# Allegro board PULSE_MODULATION.brd
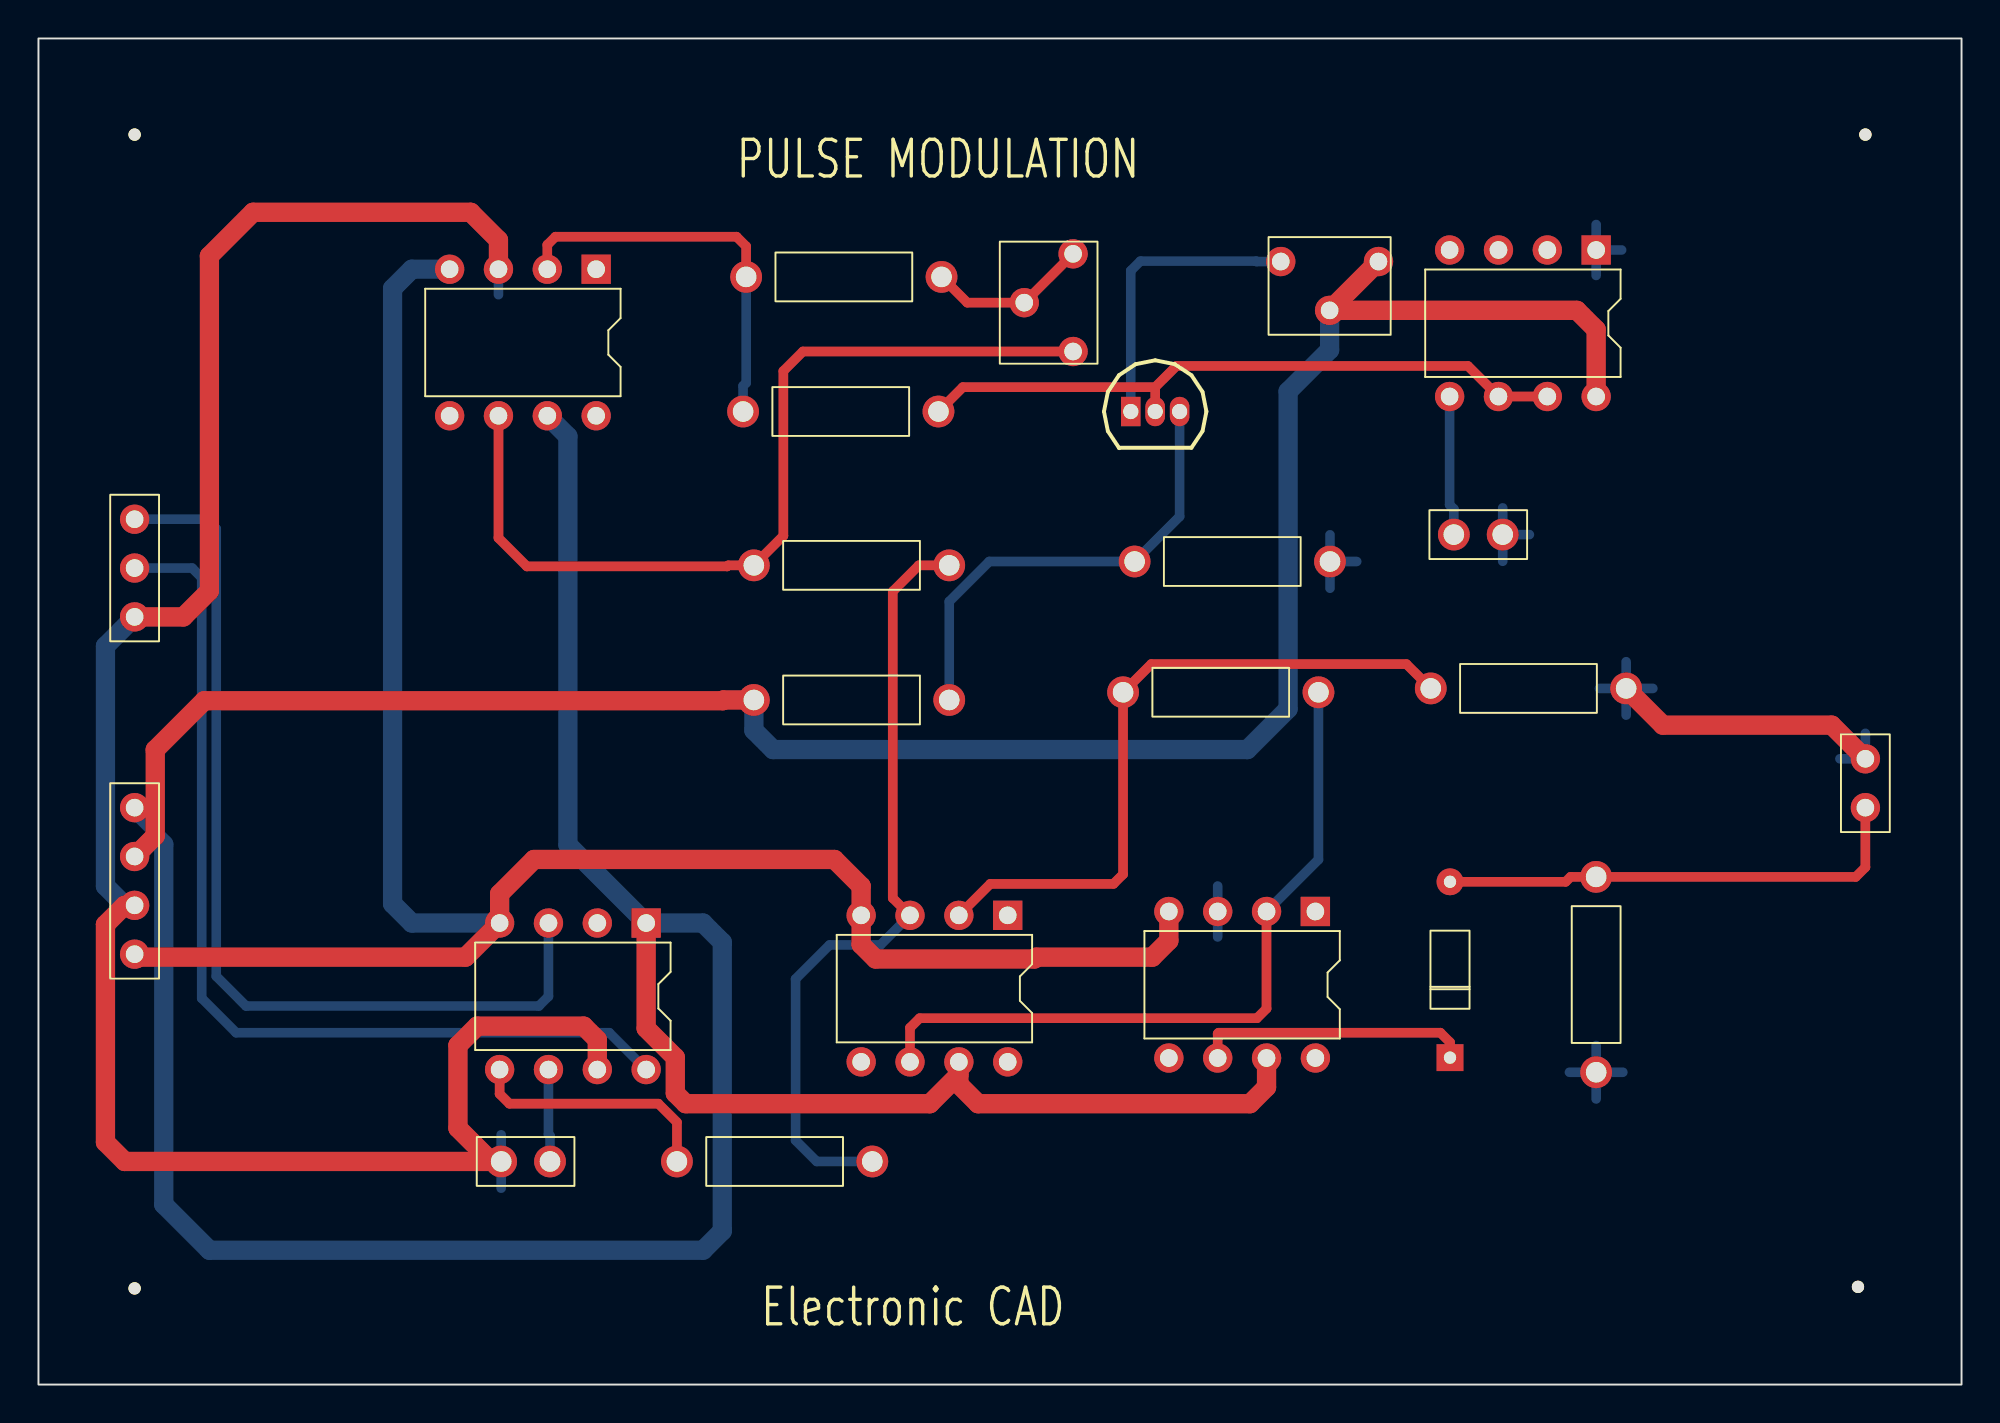
[diagram p0: board, top side]
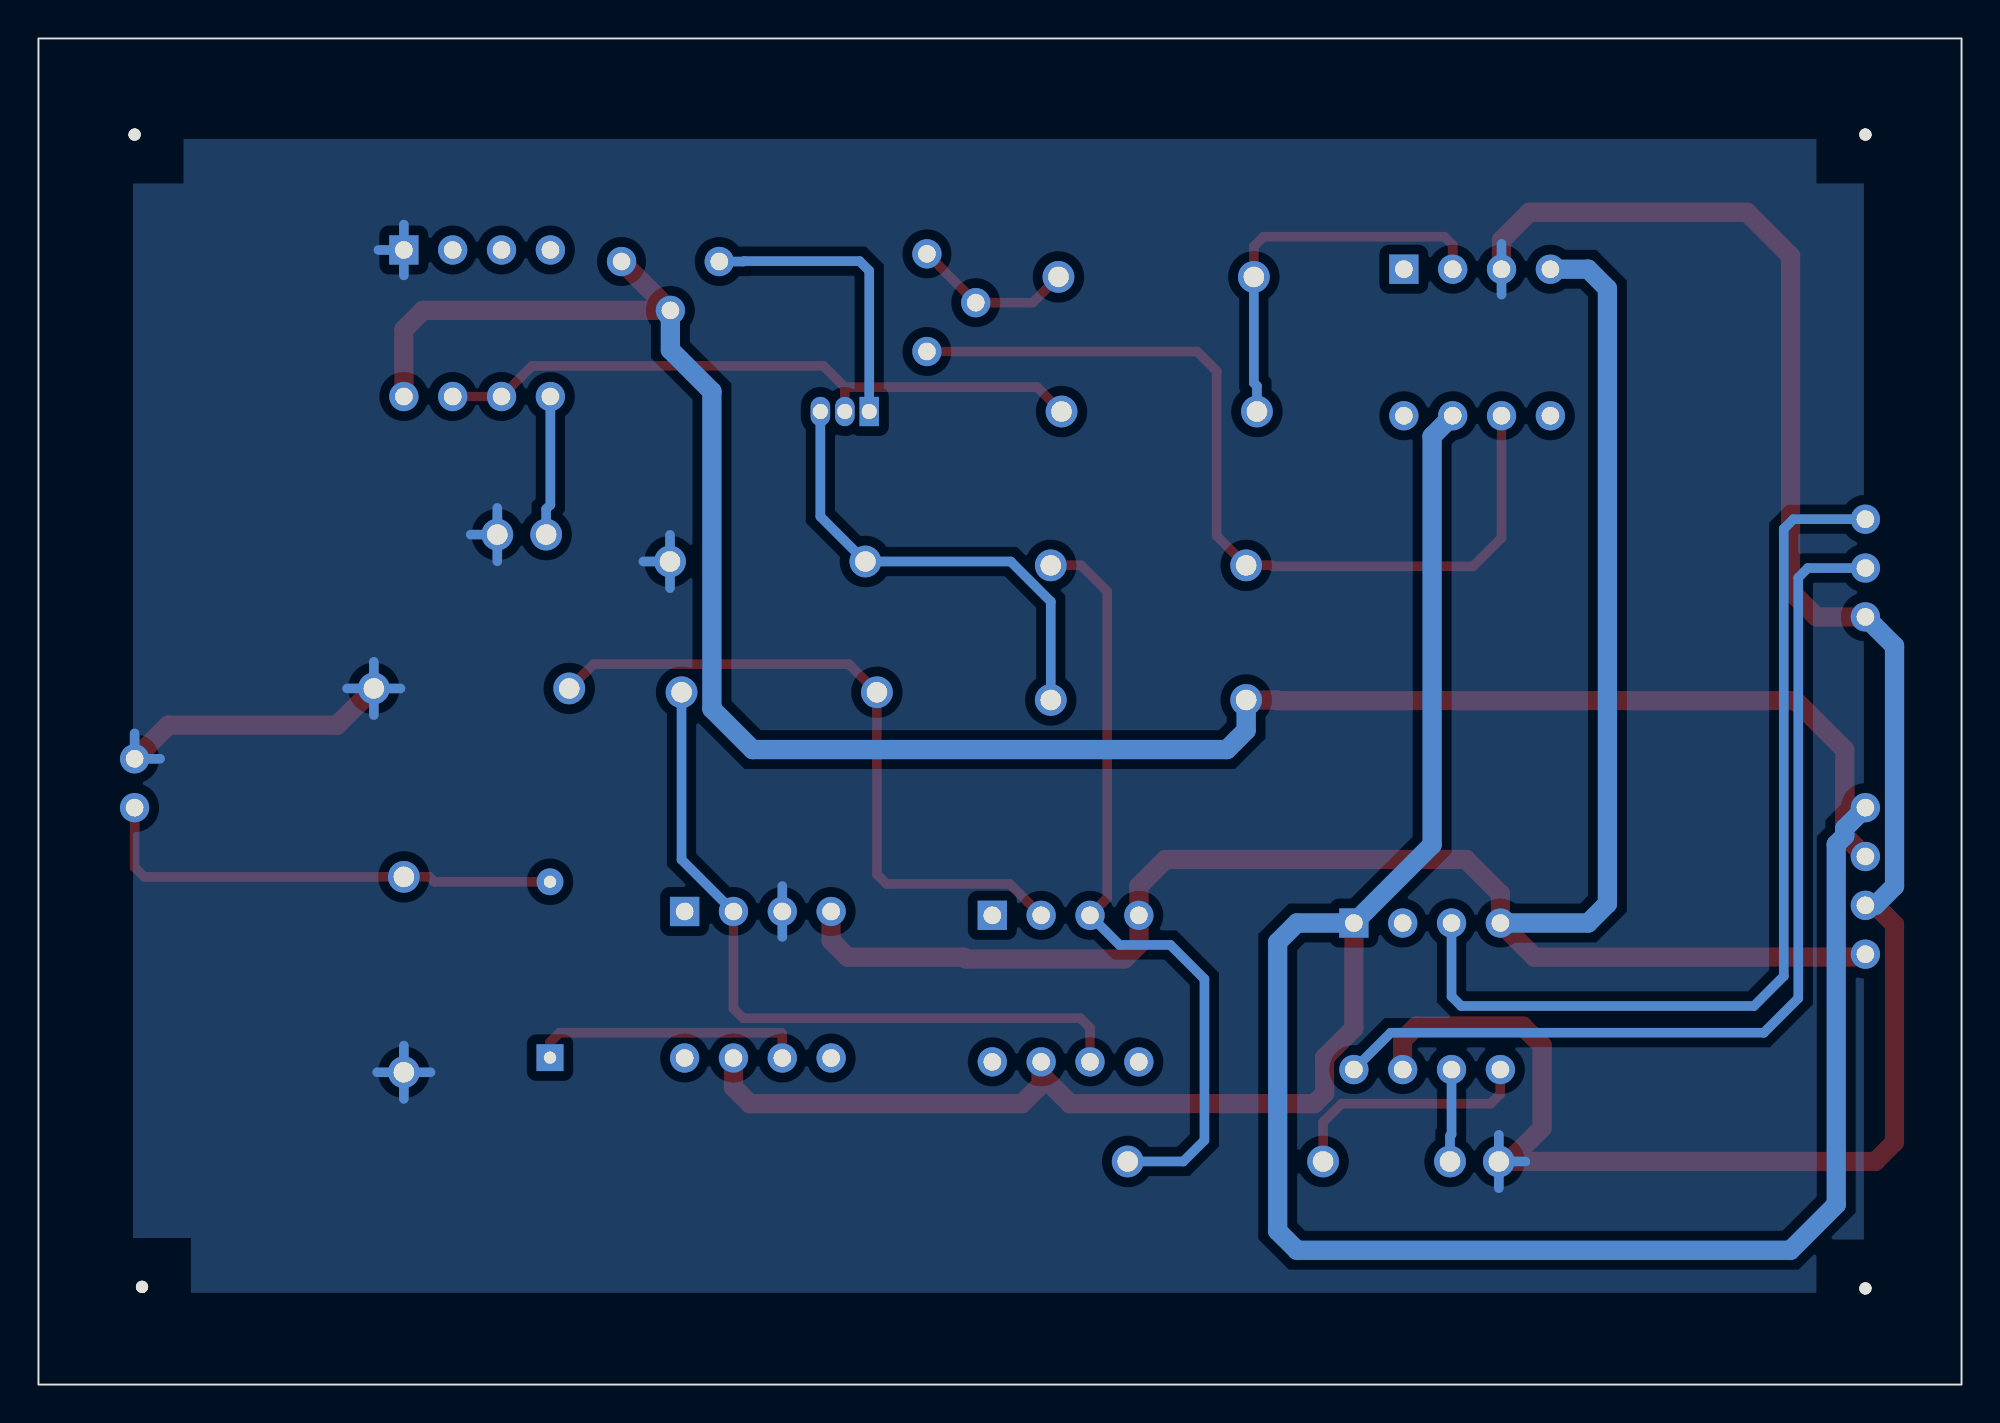
[diagram p1: board, bottom side, seen from below]

Outline 100 x 70 mm; copper layers: TOP, BOTTOM. Coordinates in mm from the lower left corner of the outline.
Outline path: rectangle 0,0 100,70

## Design rules (mm)
constraint set DEFAULT: min track width 0.5
nets with their own width: min track width 1; nets +5V +15V -15V GND

## Placement (name value [footprint] x y rotation side)
C1  0.01uF  [CAPCK05]  26.6 11.6 90 top
C2  0.01uF  [CAPCK05]  73.6 44.2 270 top
D1  D1S1588  [DO35]  73.4 17 0 top
J1  CON4  [JUMPER4]  5 30 270 top
J2  CON3  [JUMPER3]  5 45 270 top
J3  CON2  [JUMPER2]  95 30 90 top
NOREF  -  [unnamed]  5 65 0 top
NOREF#2  -  [unnamed]  94.61 5.08 0 top
NOREF#3  -  [#2]  100 0 90 top
NOREF#4  -  [#2]  0 70 0 top
NOREF#5  -  [unnamed]  5 5 0 top
NOREF#6  -  [unnamed]  95 65 0 top
Q1  Q2SA1015  [TO92]  56.8 50.6 0 top
R2  20k  [RESADJ]  53.8 58.8 0 top
R3  560  [RES400]  36.8 57.6 270 top
R4  6.2k  [RES400]  46.8 50.6 90 top
R5  5k  [RESADJ]  64.6 58.4 90 top
R6  39k  [RES400]  37.2 35.6 270 top
R7  100k  [RES400]  57 42.8 270 top
R8  10k  [RES400]  33.2 11.6 270 top
R9  10k  [RES400]  72.4 36.2 270 top
R10  10k  [RES400]  56.4 36 270 top
R11  10k  [RES400]  81 26.4 180 top
R12  10k  [RES400]  37.2 42.6 270 top
U1  NE555  [DIP8_3]  81 59 270 top
U2  LF398  [DIP8_3]  31.6 24 270 top
U3  LF356  [DIP8_3]  29 58 270 top
U4  LF356  [DIP8_3]  50.4 24.4 270 top
U5  LF356  [DIP8_3]  66.4 24.6 270 top

## Library data of the parts
C1 C2 = CAP NP: Tolerance: ***; User Part Number: ***
D1 = D1S1588
J1 = CON4: User Part Number: ***
J2 = CON3: User Part Number: ***
J3 = CON2: User Part Number: ***
Q1 = Q2SA1015
R2 R5 = POT: Tolerance: ***; User Part Number: ***
R3 R4 R6-R12 = R: Tolerance: ***; User Part Number: ***
U1 = NE555: Tolerance: ***; User Part Number: ***
U2 = LF398: Tolerance: ***; User Part Number: ***
U3-U5 = LF356_0: Tolerance: ***; User Part Number: ***

## Footprints (pads in the part's own frame, mm; a bottom-side part is the same pattern mirrored in y, then rotated)
CAPCK05
  round 1.651 hole 1.067: 1(0,0) 2(0,2.54)
DIP8_3
  rect 1.524x1.524 hole 0.914: 1(0,0)
  round 1.524 hole 0.914: 2(0,-2.54) 3(0,-5.08) 4(0,-7.62) 5(7.62,-7.62) 6(7.62,-5.08) 7(7.62,-2.54) 8(7.62,0)
DO35
  rect 1.397x1.397 hole 0.635: 1(0,0)
  round 1.397 hole 0.635: 2(0,9.144)
JUMPER2
  round 1.524 hole 0.914: 1(0,0) 2(2.54,0)
JUMPER3
  round 1.524 hole 0.914: 1(0,0) 2(2.54,0) 3(5.08,0)
JUMPER4
  round 1.524 hole 0.914: 1(0,0) 2(2.54,0) 3(5.08,0) 4(7.62,0)
RES400
  round 1.651 hole 1.067: 1(0,0) 2(0,10.16)
RESADJ
  round 1.524 hole 0.914: 1(0,0) 2(-2.54,-2.54) 3(0,-5.08)
TO92
  rect 1.016x1.524 hole 0.787: 1(0,0)
  oval 1.016x1.524 hole 0.787: 2(1.27,0) 3(2.54,0)
unnamed
  round 0.635 hole 3.175 unplated: (0,0)

## Nets
+5V: J1.2 R5.2(WIPER) R5.3 R6.1 U1.8(VCC)
+15V: J1.1 U2.1 U3.7 U4.7 U5.7
-15V: J1.4 U2.4(V-) U3.4(V-) U4.4(V-) U5.4(V-)
GND: C1.2 C2.2 J1.3 J2.3 J3.2 R7.2 R9.2 R11.2 U1.1 U2.7 U3.3 U5.3
CLOCK: U1.2
SIG_1: R2.3 R12.1 U3.6
N00459: J2.1 U2.3
N00471: J2.2 U2.8
N00485: C1.1 U2.6
N00620: C2.1 U1.5
N00691: Q1.2 R4.1 U1.6 U1.7
N00849: R3.1 R4.2 U3.2
N01046: R2.1 R2.2(WIPER) R3.2
N01815: Q1.3 R6.2 R7.1
N02449: R8.2 R12.2 U4.3
N02479: R9.1 R10.1 U4.2
N02739: R10.2 U4.6 U5.2
N03371: D1.1 U5.6
N03400: D1.2 J3.1 R11.1
N003861: R8.1 U2.5
N013610: Q1.1(E) R5.1

Pads without a net: U1 3 4; U2 2; U3 1 5 8; U4 1 5 8; U5 1 5 8

## Routing (per net, layer and track width the routed paths; a pad name or vN(x,y) marks a point on that pad's centre or on a via; arc(x,y) is an arc through that point)
+5V: length 111.8
  TOP w1: R6.1 35.62,35.6 35.58,35.56 8.62,35.56 6.07,33.01 6.07,28.53 J1.2 ; R5.3 R5.2 80,55.86 81,54.86 U1.8
  BOTTOM w1: R5.2 67.14,53.8 64.98,51.64 64.98,35.14 62.86,33.02 38.2,33.02 37.2,34.02 R6.1
+15V: length 144.1
  TOP w1: 47.86,16.11 47.86,15.61 48.86,14.61 63,14.61 63.86,15.46 U5.7 ; 47.86,16.11 46.35,14.61 33.66,14.61 33.12,15.14 33.12,17.01 31.6,18.52 U2.1 ; 47.86,16.11 U4.7
  BOTTOM w1: J1.1 6.07,28.93 6.07,28.53 6.52,28.09 6.52,9.36 8.89,6.99 34.56,6.99 35.56,7.99 35.56,23 34.56,24 U2.1 27.53,28.07 27.53,49.31 U3.7
-15V: length 104
  TOP w1: U5.4 58.78,23.08 57.92,22.23 51.88,22.23 51.79,22.13 43.53,22.13 42.78,22.88 U4.4 42.78,25.92 41.39,27.3 25.77,27.3 23.98,25.52 U2.4 22.2,22.23 5.16,22.23 J1.4
  BOTTOM w1: U3.4 19.42,58 18.41,57 18.41,25 19.41,24 U2.4
GND: length 156.5
  TOP w1: J1.3 4.48,24.92 3.48,23.92 3.48,12.6 4.48,11.6 23.55,11.6 ; U3.3 23.92,59.52 22.48,60.96 11.16,60.96 8.89,58.69 8.89,41.27 7.54,39.92 J2.3 ; J3.2 93.25,34.29 84.47,34.29 R9.2 ; 23.55,11.6 C1.2 ; 23.55,11.6 21.81,13.34 21.81,17.64 22.81,18.64 28.35,18.64 29.06,17.93 U2.7
  BOTTOM w0.5: U1.1 81,60.32 ; U1.1 82.32,59 ; U1.1 81,57.68 ; 67.16,41.41 R7.2 ; R7.2 67.16,44.19 ; R7.2 68.55,42.8 ; C2.2 76.14,45.59 ; C2.2 76.14,42.81 ; C2.2 77.53,44.2 ; R11.2 81,17.63 ; R11.2 82.39,16.24 ; R11.2 81,14.85 ; R11.2 79.61,16.24 ; 82.56,34.81 R9.2 ; R9.2 82.56,37.59 ; R9.2 81.17,36.2 ; R9.2 83.95,36.2 ; 23.92,56.68 U3.3 23.92,59.32 ; 93.68,32.54 J3.2 95,33.86 ; 61.32,23.28 U5.3 61.32,25.92 ; 22.67,11.6 C1.2 ; C1.2 24.06,12.99 ; C1.2 24.06,10.21
  BOTTOM w1: J1.3 4.48,24.92 3.48,25.92 3.48,38.4 J2.3
SIG_1: length 46.5
  TOP w0.5: U3.6 23.92,44.02 25.4,42.55 35.81,42.55 35.87,42.6 R12.1 38.73,44.13 38.73,52.7 39.75,53.72 R2.3
N00459: length 49.7
  BOTTOM w0.5: U2.3 26.52,20.18 26.02,19.68 10.79,19.68 9.24,21.23 9.24,44.5 8.74,45 J2.1
N00471: length 50.2
  BOTTOM w0.5: U2.8 29.68,18.3 10.28,18.3 8.49,20.09 8.49,41.96 7.99,42.46 J2.2
N00485: length 4.8
  BOTTOM w0.5: C1.1 26.6,12.93 26.52,13.01 U2.6
N00620: length 7.3
  BOTTOM w0.5: C2.1 73.6,45.53 73.38,45.75 U1.5
N00691: length 34.6
  TOP w0.5: 58.07,51.87 48.07,51.87 R4.1 ; 58.07,51.87 59.17,52.97 74.33,52.97 U1.6 U1.7 ; 58.07,51.87 Q1.2
N00849: length 20.6
  TOP w0.5: R3.1 36.8,59.19 36.3,59.69 26.88,59.69 26.46,59.27 U3.2
  BOTTOM w0.5: R4.2 36.64,51.93 36.8,52.09 R3.1
N01046: length 8.4
  TOP w0.5: R2.1 R2.2 48.3,56.26 R3.2
N01815: length 24.4
  BOTTOM w0.5: Q1.3 59.34,45.14 R7.1 49.44,42.8 47.36,40.72 R6.2
N02449: length 40.9
  TOP w0.5: R12.2 45.78,42.6 44.42,41.25 44.42,25.3 U4.3
  BOTTOM w0.5: R8.2 40.47,11.6 39.37,12.7 39.37,21.09 41.14,22.86 43.78,22.86 U4.3
N02479: length 36
  TOP w0.5: U4.2 49.49,26.04 55.9,26.04 56.4,26.54 R10.1 57.87,37.47 71.14,37.47 R9.1
N02739: length 38.3
  TOP w0.5: U4.6 45.32,18.55 45.82,19.05 63.36,19.05 63.86,19.55 U5.2
  BOTTOM w0.5: U5.2 66.56,27.3 R10.2
N03371: length 14.4
  TOP w0.5: D1.1 73.4,17.8 72.9,18.3 61.37,18.3 61.32,18.25 U5.6
N03400: length 25
  TOP w0.5: D1.2 79.41,26.14 79.67,26.4 R11.1 94.5,26.4 95,26.9 J3.1
N003861: length 13.1
  TOP w0.5: U2.5 23.98,15.11 24.49,14.61 32.23,14.61 33.2,13.64 R8.1
N013610: length 15.3
  BOTTOM w0.5: Q1.1 56.8,57.92 57.3,58.42 63.31,58.42 63.33,58.4 R5.1

## Copper pours and planes (outline as drawn; the poured copper is in the pictures)
GND on BOTTOM: 95.08,4.77 95.08,64.77 5.08,64.77 5.08,4.77

## Text on the board
Ref Des/Silkscreen Top: PULSE MODULATION | Electronic CAD
DIMENSION: FIGURE | FINISHED_SIZE | 0.635 | 0.787 | 0.914 | 1.067 | 3.175 | DRILL CHART: TOP to BOTTOM | ALL UNITS ARE IN MILLIMETERS | PLATED | NON-PLATED | QTY | 2 | 3 | 55 | 22 | 4
